# Altium PCB 电击手环、.PcbDoc
Units mm, origin at the board's own origin, x right, y up, seen from the top; angles counter-clockwise.
Board outline 49.91 x 29.97 mm, 2 copper layers (Top Layer, Bottom Layer); 40 components, 35 nets, 150 pads, 18 vias.
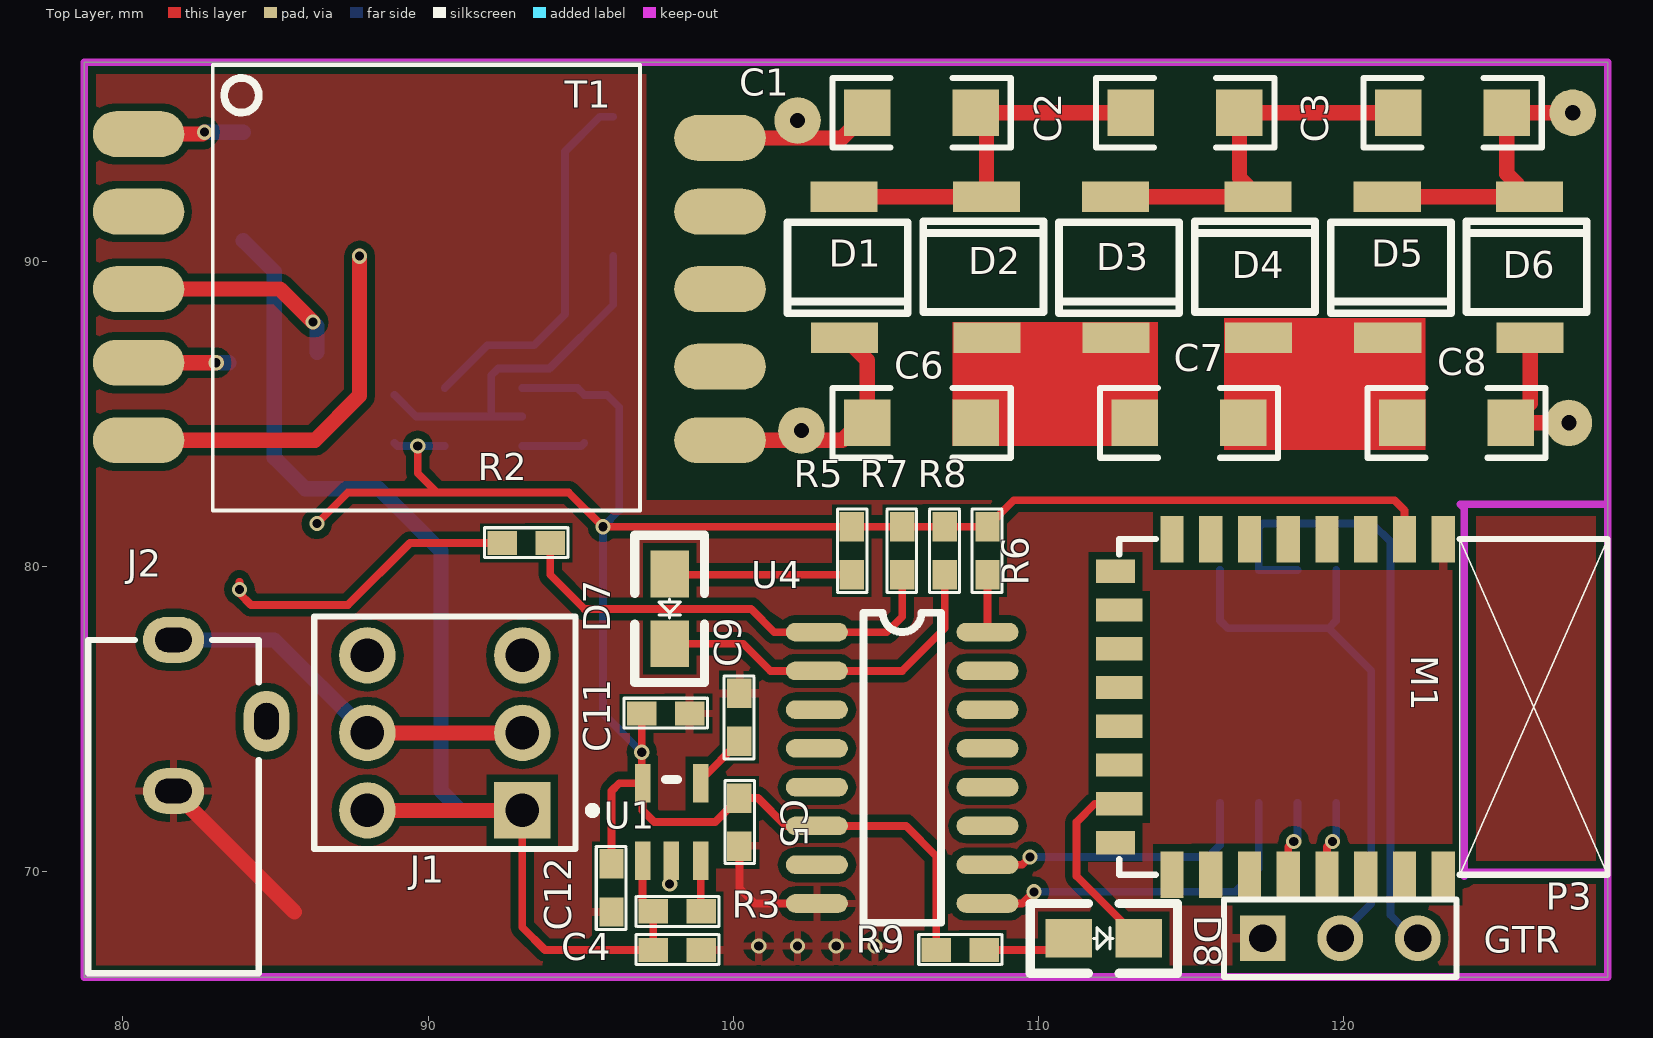
[diagram p0: Top Layer view]
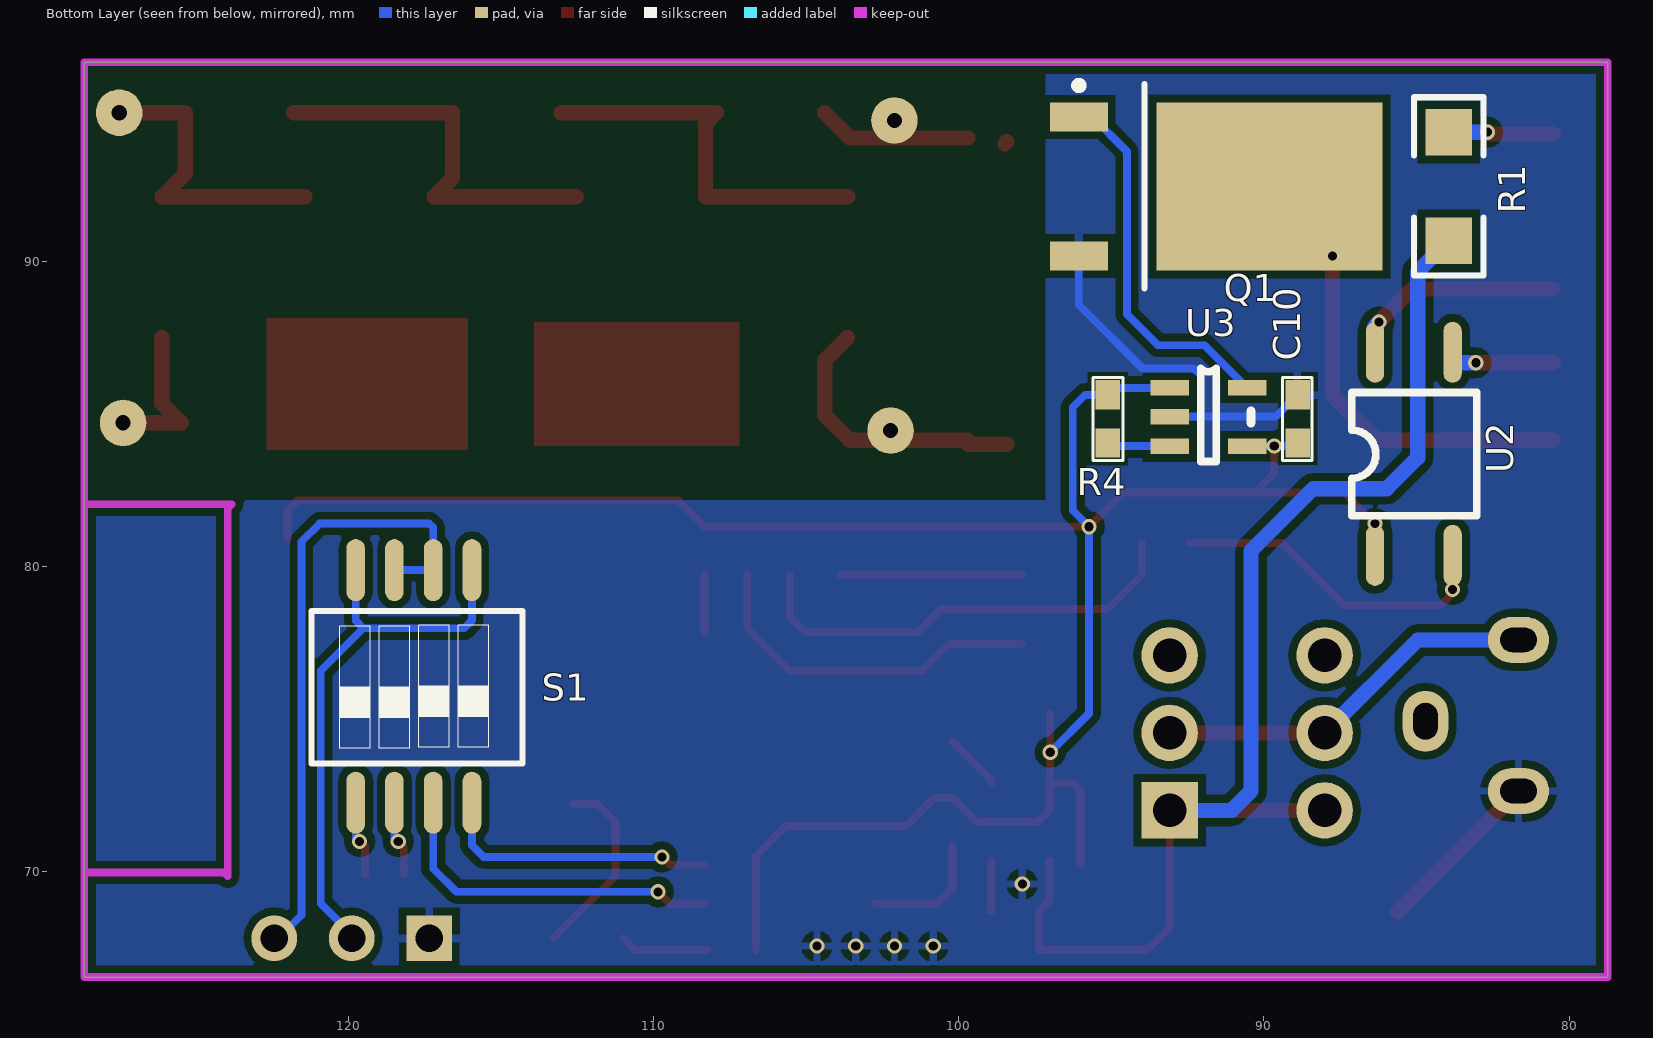
[diagram p1: Bottom Layer view, seen from below]

## Layer stack, top to bottom
Top Layer: signal copper 0.0356
Dielectric: dielectric 0.32, FR-4, Dk 4.8
Bottom Layer: signal copper 0.0356

## Board outline
78.74,66.548 78.74,96.52 128.651,96.52 128.651,66.548

## Design rules (kind name [scope] priority, off if disabled: settings)
Clearance [All] p1: gap=0.254
PolygonConnect [All] p1: connectstyle=Relief reliefconductorwidth=0.254 reliefentries=4 polygonreliefangle="90 Angle" airgapwidth=0.254
RoutingVias [All] p1: holewidth=0.711 width=1.27 viastyle="Through Hole" minholewidth=0.711 minwidth=1.27 maxholewidth=0.711 maxwidth=1.27
SolderMaskExpansion [All] p1: expansion=0.102
Width [All] p1: maxlimit=0.5 minlimit=0.254 preferedwidth=0.254 minimp=50.000000 maximp=50.000000 favimp=50.000000
28 further rules are at their usual default settings.

## Classes and differential pairs
component class 电击手环: C1 C2 C3 C4 C5 C6 C7 C8 C9 C10 C11 C12 D1 D2 D3 D4 D5 D6 D7 D8 M1 Q1 R1 R2 R3 R4 R5 R6 R7 R8 R9 S1 T1 U1 U2 U3 U4

## Components (designator, comment, footprint, x,y, rotation, side; value= is the part's Value field where it differs from the comment)
C1 "耐高压 2.2nF 2KV  10%" 1206 106.172,94.869 r180 top
C2 "耐高压 2.2nF 2KV  10%" 1206 114.808,94.869 r180 top
C3 "耐高压 2.2nF 2KV  10%" 1206 123.571,94.869 r180 top
C4 "2.2uF" R0603(1608) 98.171,67.437 r0 top
C5 "2.2uF" R0603(1608) 100.203,71.628 r270 top
C6 "耐高压 2.2nF 2KV  10%" 1206 106.172,84.709 r180 top
C7 "耐高压 2.2nF 2KV  10%" 1206 114.935,84.709 r180 top
C8 "耐高压 2.2nF 2KV  10%" 1206 123.698,84.709 r180 top
C9 "10nF" R0603(1608) 100.203,75.057 r90 top
C10 "100nF" R0603(1608) 88.9,84.836 r90 bottom
C11 "10μF" R0603(1608) 97.79,75.184 r0 top
C12 "100nF" R0603(1608) 96.012,69.469 r90 top
D1 "1N4007" DO-214AA 103.632,92.116 r270 top
D2 "1N4007" DO-214AA 108.313,87.503 r90 top
D3 "1N4007" DO-214AA 112.531,92.116 r270 top
D4 "1N4007" DO-214AA 117.212,87.503 r90 top
D5 "1N4007" DO-214AA 121.43,92.116 r270 top
D6 "1N4007" DO-214AA 126.111,87.503 r90 top
D7 "LED3" LED0805 97.917,78.613 r270 top
D8 "LED3" LED0805 112.141,67.818 r0 top
J1 "7*7 自锁开关" SWITCH_B1 90.551,74.549 r180 top
J2 "DC-002" DC-002 81.661,77.597 r90 top
M1 "Z151-A" Z151-A 112.649,80.899 r270 top
P3 "Comment" HDR1X3 117.348,67.818 r0 top
Q1 "LR2905Z" TO-252AA_N 91.567,92.456 r180 bottom
R1 "FSMD100-1206R" 1206 83.947,92.456 r90 bottom
R2 "1K" R0603(1608) 93.218,80.772 r0 top
R3 "10K" R0603(1608) 98.171,68.707 r180 top
R4 "66.5K" R0603(1608) 95.123,84.836 r270 bottom
R5 "1K" R0603(1608) 103.886,80.518 r270 top
R6 "10K" R0603(1608) 108.331,80.518 r90 top
R7 "10K" R0603(1608) 105.537,80.518 r90 top
R8 "10K" R0603(1608) 106.934,80.518 r90 top
R9 "1K" R0603(1608) 107.442,67.437 r0 top
S1 "SW DIP-4" 拨码开关1.27-5.4-4P 115.951,79.883 r0 bottom
T1 "14*14升压变压器" "14*14 升压变压器" 90.043,89.154 r270 top
U1 "SPX3819M5-3.3" SOT-25 98.933,72.898 r0 top
U2 "61GR1" G3VM 85.09,83.693 r180 bottom
U3 "LTC1799" SOT-25B 93.091,85.852 r180 bottom
U4 "STC15W201S_SOP16" SO-16 102.743,77.851 r0 top

## Footprints (in the part's own frame and the unit in brackets; to place one, negate y for a bottom-side part, rotate by r counter-clockwise, add the part's x,y. Pads: shape width x height; smd on the part's side, far side on the other; paste and mask are expansions set on the pad)
"14*14 升压变压器" [mm]
  oval 1.5x3 smd: 1(-5.016,-9.525) 2(-2.476,-9.525) 3(0.064,-9.525) 4(2.477,-9.525) 5(5.017,-9.525) 6(5.016,9.525) 7(2.603,9.525) 8(0.063,9.525) 9(-2.477,9.525) 10(-4.89,9.525)
  silkscreen extent -7.28,-7.1 7.32,6.9
1206 [mil] "贴片元件"
  rect 60x60 smd: 1(-70,0) 2(70,0)
  silkscreen extent -115,-45 115,45, body extent -75,-35 75,35, height 39
DC-002 [mm] "DC母座3.5mm"
  oval 1.5x2 hole 0.8 slot 1.2 at 90 deg: 1(0,0) 2(-4.953,0)
  oval 2x1.5 hole 0.8 slot 1.2 at 0 deg: 3(-2.667,-3.048)
  silkscreen extent -10.92,-2.79 0,2.79, body extent -10.92,-2.79 0,2.79, height 7.2
DO-214AA [mm]
  rect 1x2.2 smd: 1(4.613,0.016) 2(0,0)
  silkscreen extent 0.84,-1.85 3.81,2.09
G3VM [mm]
  oval 0.6x2 smd: 1(-1.27,-3.327) 2(1.27,-3.327) 3(1.27,3.327) 4(-1.27,3.327)
  silkscreen extent -2.03,-2.03 2.06,2.01
HDR1X3 [mm] "Connector; Header; 3 Position"
  rect 1.5x1.5 hole 0.9: 1(0,0)
  round 1.5 hole 0.9: 2(2.54,0) 3(5.08,0)
  silkscreen extent -1.27,-1.27 6.35,1.27
LED0805 [mil]
  rect 60x50 smd: 1(-45,0) 2(45,0)
  silkscreen extent -95,-45 95,45
R0603(1608) [mm]
  rect 0.965x0.8 smd: 1(-0.787,0) 2(0.788,0)
  silkscreen extent -1.36,-0.47 1.36,0.5, body extent -0.8,-0.4 0.8,0.4, height 1.3
SO-16 [mil]
  oval 80x24 smd: 1(0,0) 2(0,-50) 3(0,-100) 4(0,-150) 5(0,-200) 6(0,-250) 7(0,-300) 8(0,-350) 9(220,-350) 10(220,-300) 11(220,-250) 12(220,-200) 13(220,-150) 14(220,-100) 15(220,-50) 16(220,0)
  silkscreen extent 60,-375 160,25
SOT-25 [mil]
  rect 20x50 smd: 1(-75,-100) 2(-38,-100) 3(0,-100) 4(0,0) 5(-75,0)
  silkscreen extent -45,5 -30,5
SOT-25B [mil]
  rect 50x20 smd: 1(0,0) 2(0,-37) 3(0,-75) 4(100,-75) 5(100,0)
  silkscreen extent 40,-95 105,25
SWITCH_B1 [mm] "单刀"
  rect 1.85x1.85 hole 1.1: 1(-2.54,2.54)
  round 1.85 hole 1.1: 2(-2.54,0) 3(-2.54,-2.54) 4(2.54,-2.54) 5(2.54,0) 6(2.54,2.54)
  silkscreen extent -4.96,-3.81 4.28,3.81
TO-252AA_N [mm] "D-PAK, 4-Leads, Body 6.1x6.5mm, Pitch 2.28mm, Lead Span 9.9mm, IPC Medium Density"
  rect 1.9x0.95 smd: 1(-4.5,2.28) 3(-4.5,-2.28)
  rect 7.4x5.5 smd: 4(1.75,0)
  silkscreen extent -4.62,-3.35 -2.35,3.43, body extent -2.25,-3.37 4.1,3.37, height 2.38
Z151-A [mil] "适用型号：Z151-A,  Z151PA-A,  BLE151-A,  BLE151PA-A"
  rect 60x30 smd: 1(0,418) 2(0,368) 3(0,318) 4(0,268) 5(0,218) 6(0,168) 7(0,118) 8(0,68) 17(433.07,68) 18(433.07,118) 19(433.07,168) 20(433.07,218) 21(433.07,268) 22(433.07,318) 23(433.07,368) 24(433.07,418)
  rect 30x50 smd: 9(41.53,-5) 16(391.53,-5)
  rect 30x60 smd: 10(91.53,0) 11(141.53,0) 12(191.53,0) 13(241.53,0) 14(291.53,0) 15(341.53,0)
  silkscreen extent 0,0 433,630, body extent 0,0 433,630, height 35
拨码开关1.27-5.4-4P [mil]
  oval 24x80 smd: 1(0,0) 2(50,0) 3(100,0) 4(150,0) 5(150,300) 6(100,300) 7(50,300) 8(0,300)
  round 39.37 on Bottom Overlay: 7(-72,275)
  silkscreen extent -65,53 207,249

## Part data
C1 C2 C3 C6 C7 C8 C12: library part Cap, "Capacitor"
C4 C5 C9 C10: library part CAP, "Capacitor"
C11: library part "Cap Pol1", "Polarized Capacitor (Radial)"
D1 D2 D3 D4 D5 D6: library part Diode_1, "二极管"
D7 D8: "Typical BLUE SiC LED"
M1: "Z151板载天线版本：Z151-A"
Q1: library part MOSFET-N, "N-Channel MOSFET"
R1 R2 R3 R4 R5 R6 R7 R8 R9: library part Res1, "Resistor"
S1: "DIP Switch, 2 Position, SPST"
U1: library part SP6205, "Low Noise, 300mA and 500mA CMOS LDO Regulators"
U2: library part Optoisolator1, "4-Pin Phototransistor Optocoupler"
U4: library part STC15W201S_SOP16_DIP16

## Free pads (board coordinates)
  round 1.524 hole 0.5: 0(102.235,84.455) 1(127.381,84.709) 2(102.108,94.615) 3(127.508,94.869)

## Via types
v1: diameter 0.5, hole 0.3, Top Layer to Bottom Layer, 18 vias

## Nets (pads, with @x,y where several pads share a name; then routed paths per layer and width w, separated by ;. In a path a pad name is that pad's centre, name@x,y a point inside that pad or via, vN(x,y) a via of type N, cw(c..) or ccw(c..) an arc to the next point about the centre after c; other vN are vias at no path point)
15KHZ: Q1.1 U3.5 | length 12.3
  Bottom Layer w0.254: U3.5 91.948,87.249 93.472,87.249 94.488,88.265 94.488,93.599 95.625,94.736 Q1.1
51_RXD: S1.7@117.221,72.263 U4.9 | length 11.5
  Top Layer w0.254: U4.9 109.474,68.961 v1(109.855,69.342)
  Bottom Layer w0.254: v1(109.855,69.342) 116.459,69.342 117.221,70.104 S1.7@117.221,72.263
51_TXD: S1.8 U4.10 | length 9.3
  Top Layer w0.254: U4.10 109.474,70.231 v1(109.728,70.485)
  Bottom Layer w0.254: v1(109.728,70.485) 115.57,70.485 115.951,70.866 S1.8
+3.3: C5.1 C10.1 C11.1 C12.2 M1.2 R4.1 R5.1 R6.2 R7.2 R8.2 R9.1 U1.5 U2.1 U3.1 U3.4 U4.6 | length 77.6
  Top Layer w0.254: v1(86.36,81.407) 87.376,82.423 90.297,82.423 ; v1(89.662,83.947) 89.662,83.058 90.297,82.423 ; C12.2 96.012,72.644 96.266,72.898 U1.5 ; C11.1 v1(97.003,73.914) 97.003,72.923 U1.5 ; R9.1 106.655,70.51 105.664,71.501 U4.6 101.727,71.501 100.813,72.415 C5.1 99.416,71.628 97.409,71.628 97.028,72.009 U1.5 ; M1.2 121.996,81.839 121.666,82.169 109.194,82.169 R6.2 R8.2 R7.2 R5.1 v1(95.733,81.305) 94.615,82.423 90.297,82.423
  Bottom Layer w0.254: C10.1 89.002,83.947 U3.4 ; U3.1 94.894,85.852 R4.1 95.86,85.623 96.266,85.217 96.266,81.839 v1(95.733,81.305) 95.733,75.184 v1(97.003,73.914)
GND: C4.2 C5.2 C9.2 C10.2 C11.2 C12.1 J2.2 M1.1 P3.1 Q1.3 U1.2 U3.2 U4.8 | length 22.1
  Top Layer w0.254: C5.2 100.203,69.469 100.711,68.961 U4.8
  Top Layer w0.5: J2.2 85.623,68.682
  Bottom Layer w0.254: C10.2 89.611,84.912 U3.2 ; 92.075,84.963 92.075,86.264 92.298,86.487 93.98,86.487 96.067,88.574 Q1.3
  other v1: 100.838,67.564 102.108,67.564 103.378,67.564 104.648,67.564 97.917,69.596
IN: D7.2 R8.1 U4.2 | length 11.7
  Top Layer w0.254: D7.2 100.33,77.47 101.219,76.581 U4.2 105.537,76.581 106.934,77.978 R8.1
LED-RED: R6.1 U4.16 | length 1.9
  Top Layer w0.254: U4.16 R6.1
NetC1_1: C1.1 C2.2 D1.2 D2.1 | length 12.6
  Top Layer w0.5: D1.2 D2.1 108.297,94.522 C1.1 C2.2
NetC1_2: C1.2 pad.2 T1.10 | length 5.1
  Top Layer w0.5: T1.10@98.425,93.916 T1.10@98.489,93.853 ; T1.10@99.695,94.043 103.569,94.043 C1.2
NetC2_1: C2.1 C3.2 D3.2 D4.1 | length 12.9
  Top Layer w0.5: D3.2 D4.1 116.586,92.726 C2.1 C3.2
NetC3_1: C3.1 D5.2 D6.1 pad.3 | length 9.9
  Top Layer w0.5: D5.2 D6.1 125.349,92.862 C3.1 pad.3
NetC6_1: C6.1 C7.2 D2.2 D3.1
NetC7_1: C7.1 C8.2 D4.2 D5.1
NetC9_1: C9.1 U1.4 | length 1.9
  Top Layer w0.254: U1.4 98.933,73 C9.1
NetD7_1: D7.1 R5.2 | length 6
  Top Layer w0.254: D7.1 97.943,79.73 R5.2
NetD7_2: U4.15
NetD8_1: D8.1 R9.2 | length 2.9
  Top Layer w0.254: R9.2 110.617,67.437 D8.1
NetD8_2: D8.2 M1.15 | length 6.3
  Top Layer w0.254: M1.15 111.848,72.224 111.252,71.628 111.252,69.85 D8.2
NetQ1_3: Q1.4 T1.5 | length 12.4
  Top Layer w0.5: T1.5 86.296,84.138 87.757,85.598 v1(87.757,90.17)
NetR1_2: R1.2 T1.1 | length 3.5
  Top Layer w0.5: T1.1 82.614,94.17 v1(82.677,94.234)
  Bottom Layer w0.5: v1(82.677,94.234) R1.2
NetR2_1: R2.1 U2.2 | length 10
  Top Layer w0.254: 83.82,79.502 83.82,79.121 84.201,78.74 87.376,78.74 89.408,80.772 R2.1
  other v1: 83.82,79.248
NetR3_1: R3.1 U1.3 | length 1.7
  Top Layer w0.254: U1.3 98.933,68.732 R3.1
NetR4_2: R4.2 U3.3 | length 2.1
  Bottom Layer w0.254: U3.3 95.021,83.947 R4.2
NetT1_3: T1.3 U2.4 | length 7.2
  Top Layer w0.5: T1.3 85.153,89.09 v1(86.233,88.011)
  Bottom Layer w0.5: v1(86.233,88.011) 86.36,87.884 U2.4
NetT1_4: T1.4 U2.3 | length 3
  Top Layer w0.5: T1.4 v1(83.058,86.677)
  Bottom Layer w0.5: v1(83.058,86.677) 83.477,86.677
OUT: R2.2 R7.1 U4.1 | length 14.9
  Top Layer w0.254: R2.2 94.006,79.73 95.123,78.613 100.584,78.613 101.346,77.851 U4.1 105.029,77.851 105.537,78.359 R7.1
RXD: P3.3 S1.2 S1.3 | length 20.6
  Bottom Layer w0.254: S1.3 S1.2 117.221,81.28 117.348,81.407 120.944,81.407 121.539,80.812 121.539,68.58 P3.3@122.301,67.818
TXD: P3.2 S1.1 S1.4 | length 19.2
  Bottom Layer w0.254: S1.1 115.951,78.232 116.205,77.978 119.507,77.978 ; 118.872,77.978 119.507,77.978 ; P3.2@119.761,67.818 120.904,68.961 120.904,76.581 119.507,77.978 ; S1.4 119.761,78.232 119.507,77.978
V3.3: 
VCC: C4.1 J1.1 J1.6 R1.1 R3.2 U1.1 | length 41.6
  Top Layer w0.254: J1.1 93.091,68.178 93.831,67.437 C4.1 R3.2 97.028,69.062 U1.1
  Top Layer w0.5: J1.6 J1.1
  Bottom Layer w0.5: R1.1 84.963,89.662 84.963,83.566 85.979,82.55 88.392,82.55 90.424,80.518 90.424,72.644 91.059,72.009 J1.1
VIN: J1.2 J1.5 J2.1 | length 12.7
  Top Layer w0.5: J1.5 J1.2
  Bottom Layer w0.5: J2.1 84.963,77.597 J1.5
Y1: C6.2 D1.1 pad.0 T1.6 | length 9.2
  Top Layer w0.5: T1.6@98.425,84.01 T1.6@99.695,84.01 ; T1.6@99.695,84.138 103.569,84.138 104.394,84.963 104.394,86.757 D1.1
Y2: C8.1 D6.2 pad.1 | length 5
  Top Layer w0.5: D6.2 126.111,85.344 C8.1 pad.1
ZG_RXD: M1.21 S1.5 | length 2.5
  Top Layer w0.254: M1.21 119.456,70.815 v1(119.634,70.993)
  Bottom Layer w0.254: v1(119.634,70.993) 119.761,71.12 S1.5
ZG_TXD: M1.20 S1.6 | length 2.5
  Top Layer w0.254: M1.20 118.186,70.815 v1(118.364,70.993)
  Bottom Layer w0.254: v1(118.364,70.993) 118.491,71.12 S1.6
pads on no net: J1.3 J1.4 J2.3 M1.3 M1.4 M1.5 M1.6 M1.7 M1.8 M1.9 M1.10 M1.11 M1.12 M1.13 M1.14 M1.16 M1.17 M1.18 M1.19 M1.22 M1.23 M1.24 S1.7@114.122,72.898 T1.2 T1.7 T1.8 T1.9 U4.3 U4.4 U4.5 U4.7 U4.11 U4.12 U4.13 U4.14

## Polygon pours and split planes (outlines as drawn)
GND on Top Layer "Top Layer-No Net" (solid, pour order 2): 78.74,82.296 78.867,82.169 128.651,82.169 128.651,66.548 78.74,66.548
GND on Top Layer "Top Layer-No Net" (solid, pour order 4): 78.74,96.52 96.901,96.52 97.155,96.266 97.155,80.518 78.74,80.518
GND on Bottom Layer "Top Layer-No Net" (solid, pour order 6): 78.74,96.52 97.155,96.52 97.155,82.169 128.651,82.169 128.651,66.548 78.74,66.548

## Keep-outs
Keep-Out Layer:
  lines w0.254: 128.651,69.977 124.079,69.977 123.952,69.85 123.952,81.915 123.825,82.042 128.651,82.042 ; 78.74,66.548 78.74,96.52 128.651,96.52 128.651,66.548 78.74,66.548

## Other copper
Top Layer:
  rectangle net NetC6_1: 107.188,83.947 113.919,88.011
  rectangle net NetC7_1: 116.078,83.82 122.682,88.138

## Silkscreen, mask and mechanical layers (free items; w line width, h text height)
Top Overlay:
  text "GTR" at 124.587,67.056 h1.5

## Dimensions
128.651,96.52 to 128.651,66.548 on Top Overlay
78.74,96.52 to 128.651,96.52 on Top Overlay